# Altium PCB PCB1 (2).PCBDOC
Units mil, origin at the board's own origin, x right, y up, seen from the top; angles counter-clockwise.
Board outline 2620 x 1990 mil, 2 copper layers (TopLayer, BottomLayer); 14 components, 8 nets, 43 pads, 0 vias.
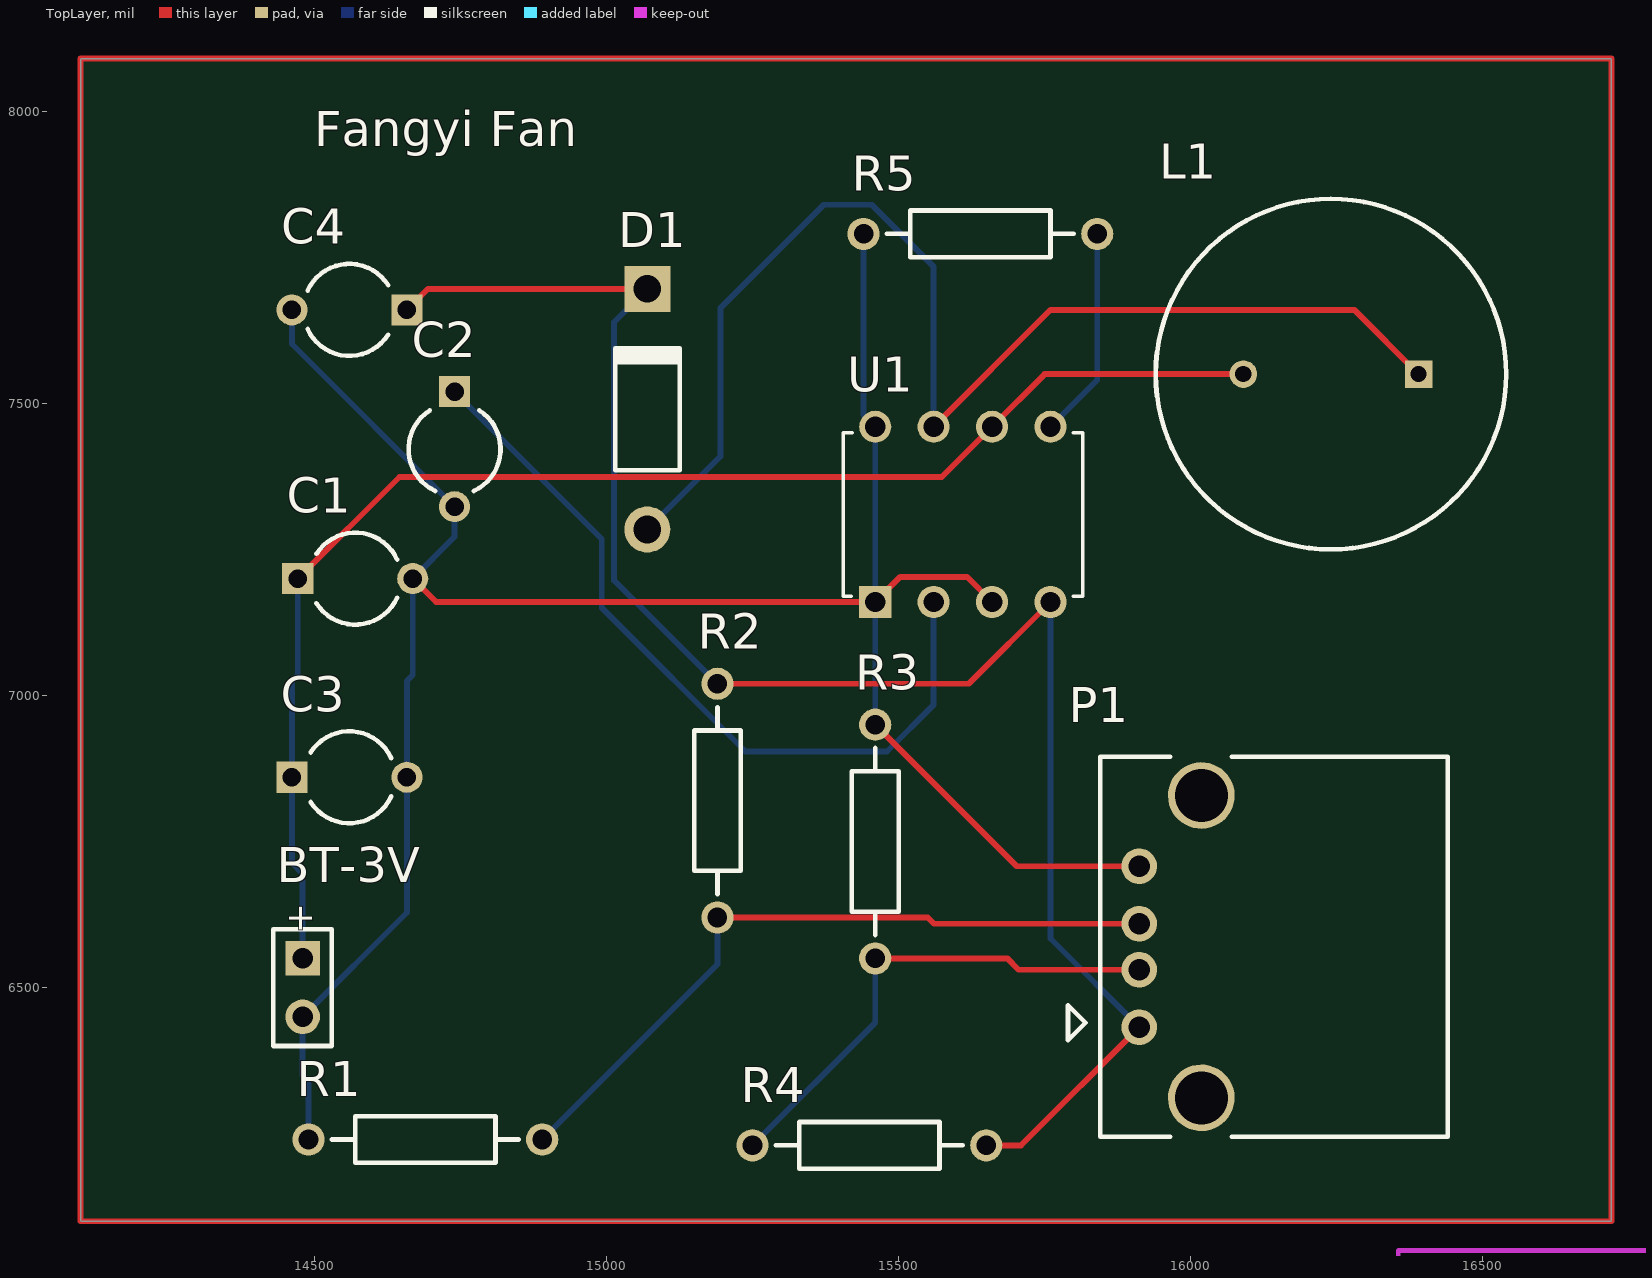
[diagram p0: TopLayer view]
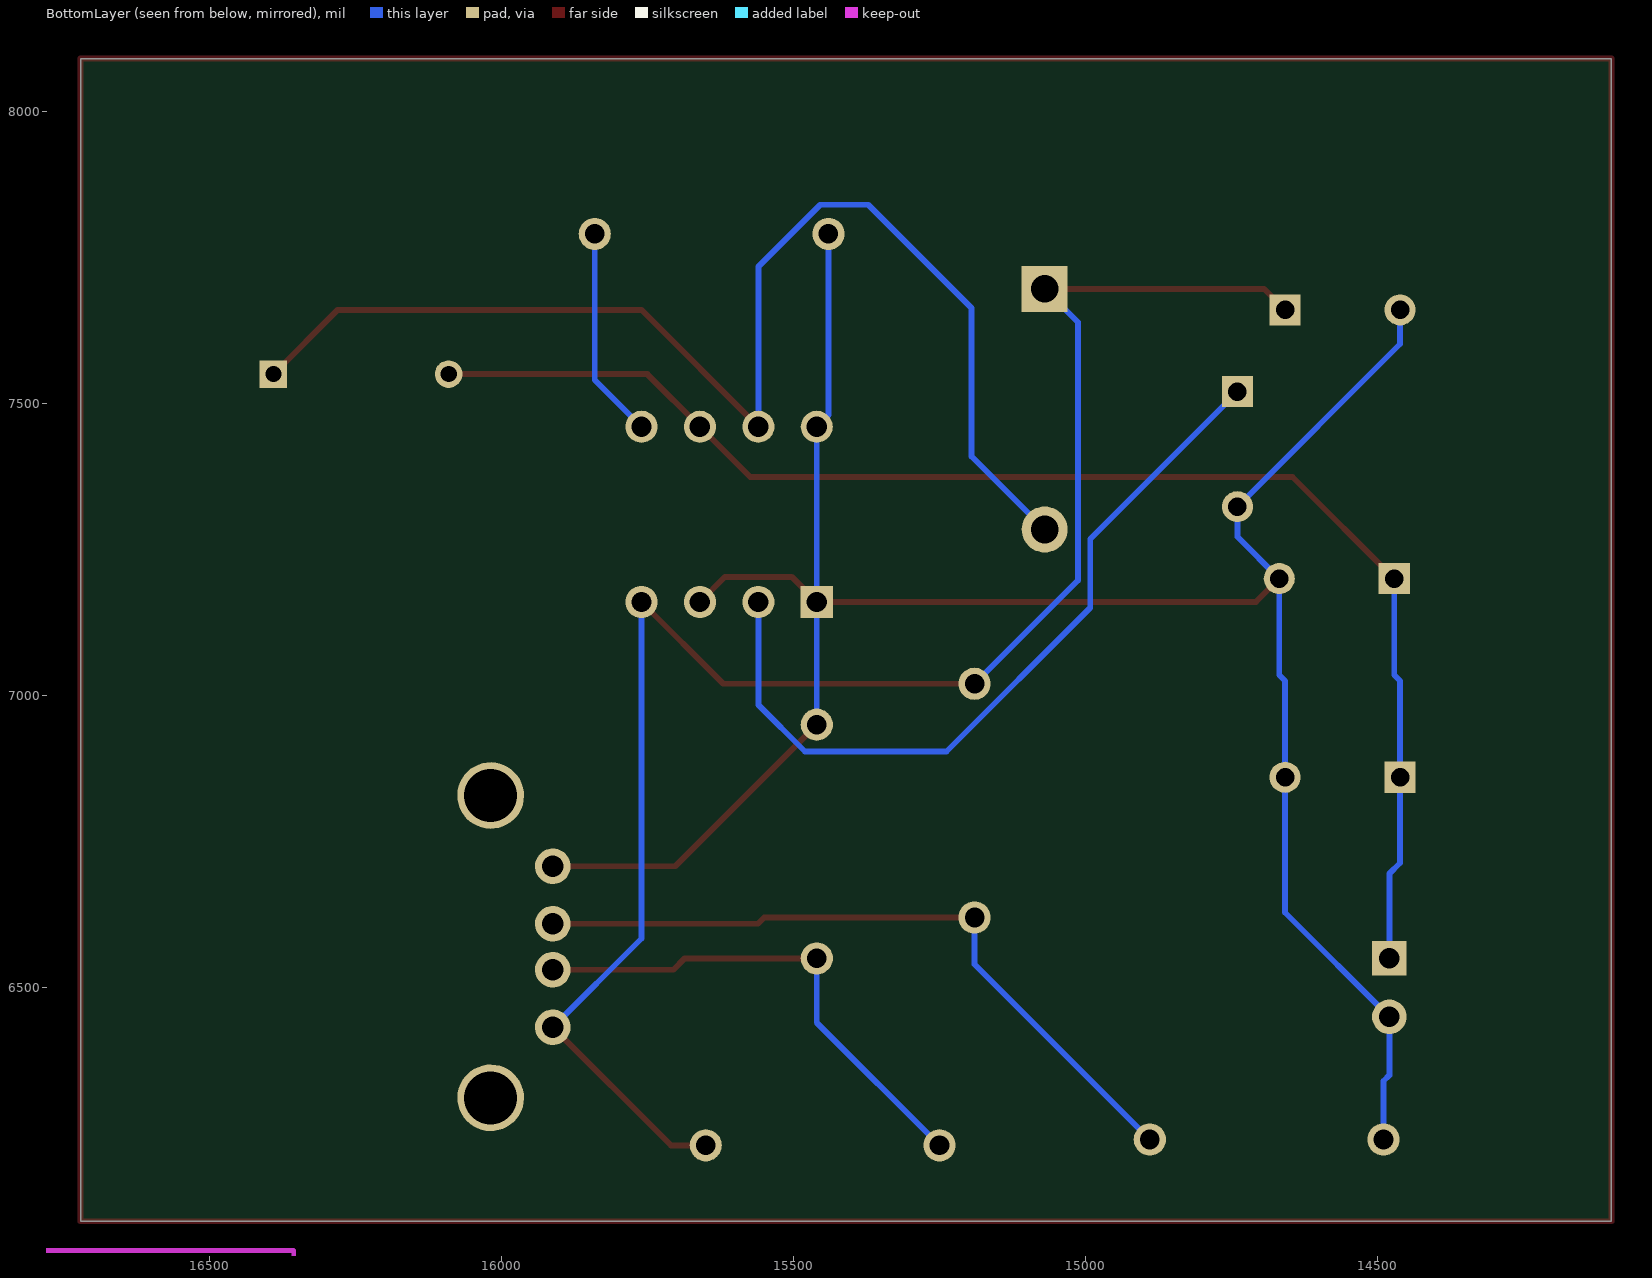
[diagram p1: BottomLayer view, seen from below]

## Layer stack, top to bottom
TopSolder: solder mask 0.4, Solder Resist, Dk 3.5
TopLayer: signal copper 1.4
Dielectric1: core 12.6, FR-4, Dk 4.8
BottomLayer: signal copper 1.4
BottomSolder: solder mask 0.4, Solder Resist, Dk 3.5

## Board outline
14100,6100 16720,6100 16720,8090 14100,8090

## Design rules (kind name [scope] priority, off if disabled: settings)
Clearance [All] p1: gap=10 ignorepadtopadclearanceinfootprint=FALSE except(0: Arc-Hole Track-Hole SMDPad-Hole THPad-Hole Via-Hole Fill-Hole Poly-Hole Region-Hole Text-Hole)
FabricationTestPointUsage TestPointUsage [All] p1: valid=0 allowmultiple=FALSE
FabricationTestpoint Testpoint [All] p1: side=3 testpointundercomponent=TRUE minsize=40 maxsize=100 preferedsize=60 minholesize=20 maxholesize=40 preferedholesize=32 testpointgrid=1 allowsidetop=TRUE allowsidebottom=TRUE usegrid=TRUE gridtolerance=0.01
PasteMaskExpansion PasteMaskExpansion_1 [InComponent('P1')] p1: expansion=-150
PasteMaskExpansion [All] p2: expansion=0
PlaneClearance [All] p1: clearance=10
PolygonConnect [All] p1: connectstyle=Relief reliefconductorwidth=10 reliefentries=4 polygonreliefangle="90 Angle" airgapwidth=10
RoomDefinition lab1ese319 [InComponentClass('lab1ese319')] p1: confinementstyle=ConfineIn formatcopy=TRUE lockcomponents=FALSE outline 17350,5770 21700,5770 21700,6570 17350,6570
RoomDefinition "AT long bus (13.3 x 4.2 inches)" [InComponentClass('AT long bus (13.3 x 4.2 inches)')] p2: confinementstyle=ConfineIn formatcopy=TRUE lockcomponents=FALSE outline 0,0 2000,0 2000,1000 0,1000
RoutingVias [All] p1: holewidth=28 width=50 viastyle="Through Hole" minholewidth=28 minwidth=50 maxholewidth=28 maxwidth=50
SilkToSolderMaskClearance SilkscreenOverComponentPads [IsPad] p1: minsilkscreentomaskgap=10 clearancetoexposedcopper=TRUE
SolderMaskExpansion [All] p1: expansion=2
Width [All] p1: maxlimit=10 minlimit=10 preferedwidth=10
25 further rules are at their usual default settings.

## Classes and differential pairs
component class "AT long bus (13.3 x 4.2 inches)": P?
component class lab1ese319: BT-3V C1 C2 C3 C4 D1 L1 R1 R2 R3 R4 R5 U1

## Components (designator, comment, footprint, x,y, rotation, side; value= is the part's Value field where it differs from the comment)
BT-3V "Battery" BAT-2 14480,6500 r270 top
C1 "Cap2" CAPR5-4X5 14570,7200 r0 top value=0.1u
C2 "Cap2" CAPR5-4X5 14740,7421.57 r270 top value=0.1u
C3 "Cap2" CAPR5-4X5 14560,6860 r0 top value=220u
C4 "Cap2" CAPR5-4X5 14560,7660 r180 top value=220u
D1 "Diode 1N4001" DO-41 15070,7490 r90 top
L1 "Inductor" Inductor 16255,7555 r90 top
P1 "USB 2.0 A" "USB 2.0 A" 16130,6590 r90 top
R1 "Res2" AXIAL-0.4 14690,6240 r0 top value=49.9K
R2 "Res2" AXIAL-0.4 15190,6820 r90 top value=75K
R3 "Res2" AXIAL-0.4 15460,6750 r270 top value=49.9K
R4 "Res2" AXIAL-0.4 15450,6230 r0 top value=75k
R5 "Res2" AXIAL-0.4 15640,7790 r0 top value=3.3K
U1 "LT1302" LT1302 15610,7300 r90 top

## Footprints (in the part's own frame and the unit in brackets; to place one, negate y for a bottom-side part, rotate by r counter-clockwise, add the part's x,y. Pads: shape width x height; smd on the part's side, far side on the other; paste and mask are expansions set on the pad)
AXIAL-0.4 [mm] "Axial Device, Thru-Hole; 2 Leads; 0.4 in Pin Spacing"
  round 1.4 hole 0.85: 1(-5.08,0) 2(5.08,0)
  silkscreen extent -4.06,-1.02 4.06,1.02
BAT-2 [mm] "Battery; 2 Leads"
  rect 1.5x1.5 hole 0.9: 1(-1.27,0)
  round 1.5 hole 0.9: 2(1.27,0)
  silkscreen extent -2.54,-1.27 2.54,1.27
CAPR5-4X5 [mm] "Capacitor; 2 Leads"
  rect 1.35x1.35 hole 0.8: 1(-2.5,0)
  round 1.35 hole 0.8: 2(2.5,0)
  silkscreen extent -1.69,-2 1.82,2
DO-41 [mm] "Diode, Axial; Body 5.2 x 2.7 mm (LxDia. max), Lead Dia. 0.86 mm (max)"
  round 2 hole 1.2: 1(-5.23,0)
  rect 2x2 hole 1.2: 2(5.23,0)
  silkscreen extent -2.65,-1.4 2.75,1.4
Inductor [mm]
  rect 1.2x1.2 hole 0.7: 1(-0.127,-3.429)
  round 1.2 hole 0.7: 2(-0.127,4.191)
  silkscreen extent -7.75,-7.24 7.49,8
LT1302 [mil]
  rect 55x55 hole 35: 1(-140,150)
  round 55 hole 35: 2(-140,50) 3(-140,-50) 4(-140,-150) 5(160,-150) 6(160,-50) 7(160,50) 8(160,150)
  silkscreen extent -130,-205 150,205
"USB 2.0 A" [mm]
  round 1.55 hole 0.92: 1(-4.008,5.541) 2(-1.508,5.541) 3(0.492,5.541) 4(2.992,5.541)
  round 2.9 hole 2.3: MH1(-7.078,2.841) MH2(6.062,2.841)
  silkscreen extent -8.76,-7.87 7.75,8.64, body extent -8.4,-7.51 7.36,6.99, height 7.8

## Part data
BT-3V: "Multicell Battery", LatestRevisionDate=17-Jul-2002, LatestRevisionNote="Re-released for DXP Platform.", PackageDescription="Battery; 2 Leads", PackageReference=BAT-2, Published=24-Mar-1999, Publisher="Altium Limited"
C1 C2 C3 C4: "Capacitor", PackageDescription="Capacitor; 2 Leads", PackageReference=CAPR5-4X5, Published=23-Sep-2002, Publisher="Altium Limited"
D1: "1 Amp General Purpose Rectifier", Code_JEDEC=DO-204-AL, ComponentLink1Description="Manufacturer Link", ComponentLink1URL=http://www.fairchildsemi.com/, ComponentLink2Description=Datasheet, ComponentLink2URL=http://www.fairchildsemi.com/ds/1N%2F1N4001.pdf, DatasheetVersion=1998, LatestRevisionDate=17-Jul-2002, LatestRevisionNote="Re-released for DXP Platform.", PackageDescription="Diode, Axial; Body 5.2 x 2.7 mm (LxDia. max), Lead Dia. 0.86 mm (max)", PackageReference=DO-41, PackageVersion=Aug-1999, Published=8-Jun-2000, Publisher="Altium Limited"
P1: library part "USB 2.0 A Connector"
R1 R2 R3 R4 R5: "Resistor", LatestRevisionDate=17-Jul-2002, LatestRevisionNote="Re-released for DXP Platform.", PackageDescription="Axial Device, Thru-Hole; 2 Leads; 0.4 in Pin Spacing", PackageReference=AXIAL-0.4, Published=8-Jun-2000, Publisher="Altium Limited"

## Free pads (board coordinates)
  round 50 hole 140: 1(17115,6175) 2(17115,9475)
  round 50 hole 125: 3(17150,9750) 4(4150,9750) 5(4150,6150)

## Nets (pads, with @x,y where several pads share a name; then routed paths per layer and width w, separated by ;. In a path a pad name is that pad's centre, name@x,y a point inside that pad or via, vN(x,y) a via of type N, cw(c..) or ccw(c..) an arc to the next point about the centre after c; other vN are vias at no path point)
5V: C4.1 D1.2 P1.1 R2.2 R4.2 U1.4 | length 2963.6
  TopLayer w10: C4.1 14694.33,7695.91 D1.2 ; R2.2 15620,7020 U1.4 ; R4.2 15709.65,6230 P1.1
  BottomLayer w10: D1.2 15013,7638.91 15013,7197 R2.2 ; U1.4 15760,6584.05 P1.1
GND: BT-3V.2 C1.2 C2.2 C3.2 C4.2 P1.4 R1.1 R3.1 R5.1 U1.1 U1.3 U1.8 | length 4091.4
  TopLayer w10: C1.2 14708.43,7160 U1.1 15503,7203 15617,7203 U1.3 ; R3.1 15702.2,6707.8 P1.4
  BottomLayer w10: C4.2 14461.57,7601.58 C2.2 14740,7271.57 C1.2 14668.43,7035 14658.43,7025 C3.2 14658.43,6628.43 BT-3V.2 14480,6350 14490,6340 R1.1 ; R5.1 15440,7480 U1.8 U1.1 R3.1
NetBT-3V_1: BT-3V.1 C1.1 C3.1 L1.2 U1.6 | length 2425.2
  TopLayer w10: C1.1 14645.57,7374 15574,7374 U1.6 15750,7550 L1.2
  BottomLayer w10: C1.1 14471.57,7035 14461.57,7025 C3.1 14461.57,6713.43 14480,6695 BT-3V.1
NetC2_1: C2.1 U1.2 | length 1353.4
  BottomLayer w10: C2.1 14992,7268 14992,7150 15238,6904 15480,6904 15560,6984 U1.2
NetD1_1: D1.1 L1.1 U1.7 | length 2145.3
  TopLayer w10: U1.7 15760,7660 16280,7660 L1.1
  BottomLayer w10: D1.1 15195,7409.09 15195,7663 15372,7840 15454,7840 15560,7734 U1.7
NetP1_2: P1.2 R3.2 R4.1 | length 866.9
  TopLayer w10: R3.2 15686,6550 15705.37,6530.63 P1.2
  BottomLayer w10: R4.1 15460,6440 R3.2
NetP1_3: P1.3 R1.2 R2.1 | length 1230.5
  TopLayer w10: R2.1 15550,6620 15560.63,6609.37 P1.3
  BottomLayer w10: R1.2 15190,6540 R2.1
NetR5_2: R5.2 U1.5 | length 363.1
  BottomLayer w10: U1.5 15840,7540 R5.2
pads on no net: P1.MH1 P1.MH2
copper on no net: | length 9220
  TopLayer w10: 14100,6100 16720,6100 16720,8090 14100,8090 14100,6100

## Keep-outs
KeepOutLayer:
  lines w8: 4105,6250 4255,6250 4255,6050 11155,6050 11155,5650 12955,5650 12955,6050 13255,6050 13255,5650 16355,5650 16355,6050 16980,6050 16980,6300 17255,6300 17255,9350 16980,9350 16980,9850 4255,9850 4255,9650 4105,9650 4105,6250

## Other copper
TopLayer:
  text ".GTL" at 17000,10000 h90
BottomLayer:
  text "P/N XXXXXX-XXX REV A" at 5320,10100 h75
  text ".GBL" at 17000,10000 h90

## Silkscreen, mask and mechanical layers (free items; w line width, h text height)
TopOverlay:
  rectangle: 4281,10303 5031,10503
  rectangle: 4281,10593 5031,10793
  lines w10: 5392.59,10695.97 ccw(c5441,10735.5) 5392.71,10695.83
  text "C" at 5496,10698 h60
  text "2002 COMPANY NAME" at 5646,10698 h75
  text "S/N" at 4031,10650.5 h75
  text "BOARD NAME" at 5496,10523 h75
  text "ASSY NO.: XXXXXX" at 5496,10373 h75
  text "REV" at 4031,10353 h75
  text ".GTO" at 17000,10000 h90
  text "Fangyi Fan" at 14500,7940 h60
TopPaste:
  text ".GTP" at 17000,10000 h90
BottomPaste:
  text ".GBP" at 17000,10000 h90
TopSolder:
  text ".GTS" at 17000,10000 h90
BottomSolder:
  text ".GBS" at 17000,10000 h90
Mechanical1:
  lines w20: 4000,6000 11080,6000 11110,5970 11110,5750 11160,5700 12950,5700 13000,5750 13000,5970 13030,6000 13180,6000 13210,5970 13210,5750 13260,5700 16350,5700 16400,5750 16400,5970 16430,6000 17300,6000 17300,9900 4000,9900 4000,6000
Mechanical3:
  lines w10: 16990,6125 16990,6075 17040,6075 ; 16990,6150 16990,6200 ; 16990,6225 16990,6275 17040,6275 ; 16990,9425 16990,9375 17040,9375 ; 16990,9450 16990,9500 ; 16990,9525 16990,9575 17040,9575 ; 17065,6075 17115,6075 ; 17065,6275 17115,6275 ; 17065,9375 17115,9375 ; 17065,9575 17115,9575 ; 17140,6075 17190,6075 ; 17140,6275 17190,6275 ; 17140,9375 17190,9375 ; 17140,9575 17190,9575 ; 17215,6075 17265,6075 ; 17215,6275 17265,6275 ; 17215,9375 17265,9375 ; 17215,9575 17265,9575 ; 17300,6075 17340,6075 17340,4925 17365,4925 17365,9650 17790,9650 17790,9675 17340,9675 17340,9575 17300,9575 ; 17300,6275 17340,6275 17340,9375 17300,9375
Mechanical4:
  circle w10: c11145.67,5719.32 r100
  lines w10: 11736.25,8648.75 11980,8405 12180,8405 ; 14230,8405 13980,8405 14273.75,8698.75 ; 18405,7800 18480,7725 18555,7800 18630,7725 18705,7800 18780,7725 18855,7800 ; 20030,7925 20755,7925 ; 22330,6675 22330,7075 22530,7175 22130,7275 22330,7375 22330,7775 ; 11003.67,5666.32 11003.67,5721.32 11023.67,5671.32 11003.67,5666.32 ; 11003.87,5721.16 11005,5775 11025.36,5771.79 11003.87,5721.16 ; 11630,8755 11755,8667.5 11717.5,8630 11630,8755 ; 14255,8717.5 14380,8805 14292.5,8680 14255,8717.5
  lines w20: 11280,9705 11280,8805 11380,8705 11580,8705 11680,8805 11680,9705 ; 14280,8905 14480,8705 15180,8705 ; 21430,6975 21430,7775
  text ".Pcb_File_Name_No_Path" at 15100,10190 h90
  text ".Printout_Name" at 15100,10000 h90
  text "o" at 12905,8430 h60
  text ".020 X 45  CHAMFER" at 12255,8355 h90
  text "0.05 X 45  CHAMFER" at 14305,8355 h90
  text "BOTH SIDES" at 12255,8180 h90
  text "TYP 4 PLCS" at 14305,8180 h90
  text "ENTIRE LENGTH OF" at 12255,8005 h90
  text "DETAIL A" at 20030,7975 h120
  text "EDGE CONNECTOR" at 12255,7830 h90
  text "o" at 22105,6500 h60
  text "SEE DETAIL A" at 10230,5675 h75
DrillDrawing:
  text ".LEGEND" at 18335,8655 h90
  text "Drilling Details." at 18340,8485 h90

## Dimensions
16350,5700 to 16430,6000 on Mechanical4
4150,5980 to 4000,6000 on Mechanical4
3980,6150 to 4000,6000 on Mechanical4

## Text inside footprints (layer, text, board x,y; h text height)
BT-3V: TopOverlay "+" at 14457.28,6644.49 h45.28 r270